# Altium PCB PCB1.PcbDoc
Units mm, origin at the board's own origin, x right, y up, seen from the top; angles counter-clockwise.
Board outline 152.4 x 101.6 mm, 2 copper layers (Top Layer, Bottom Layer); 107 components, 239 nets, 1770 pads, 0 vias.
Unrouted connection lines stored in the file: 1175.
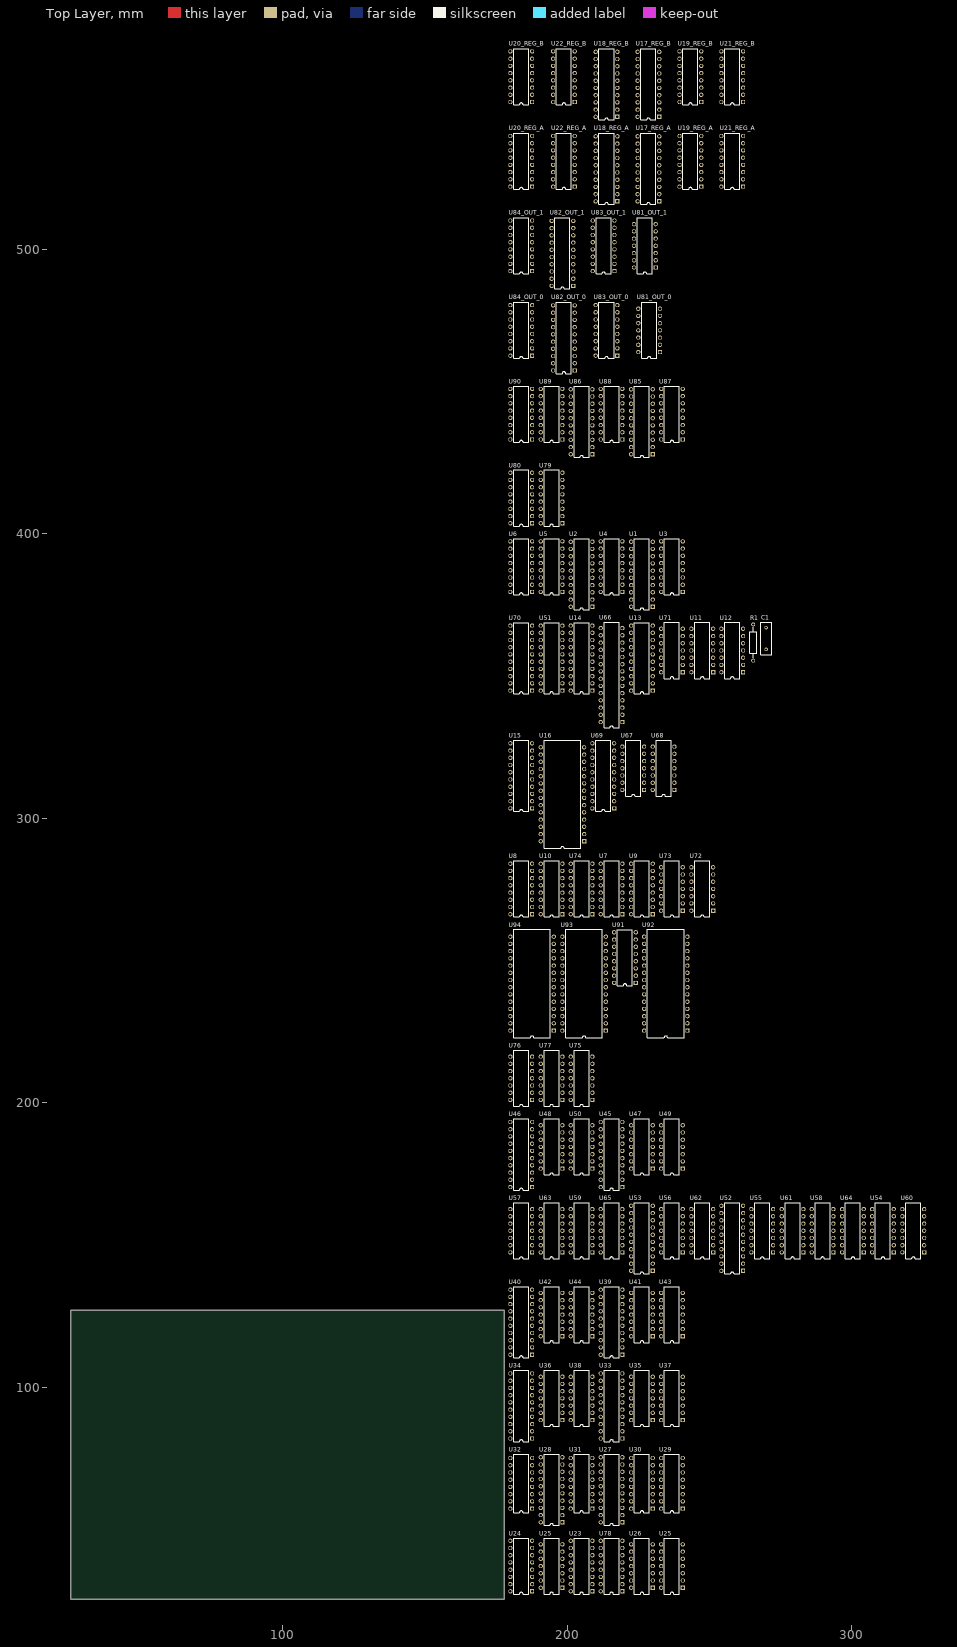
[diagram p0: Top Layer view]
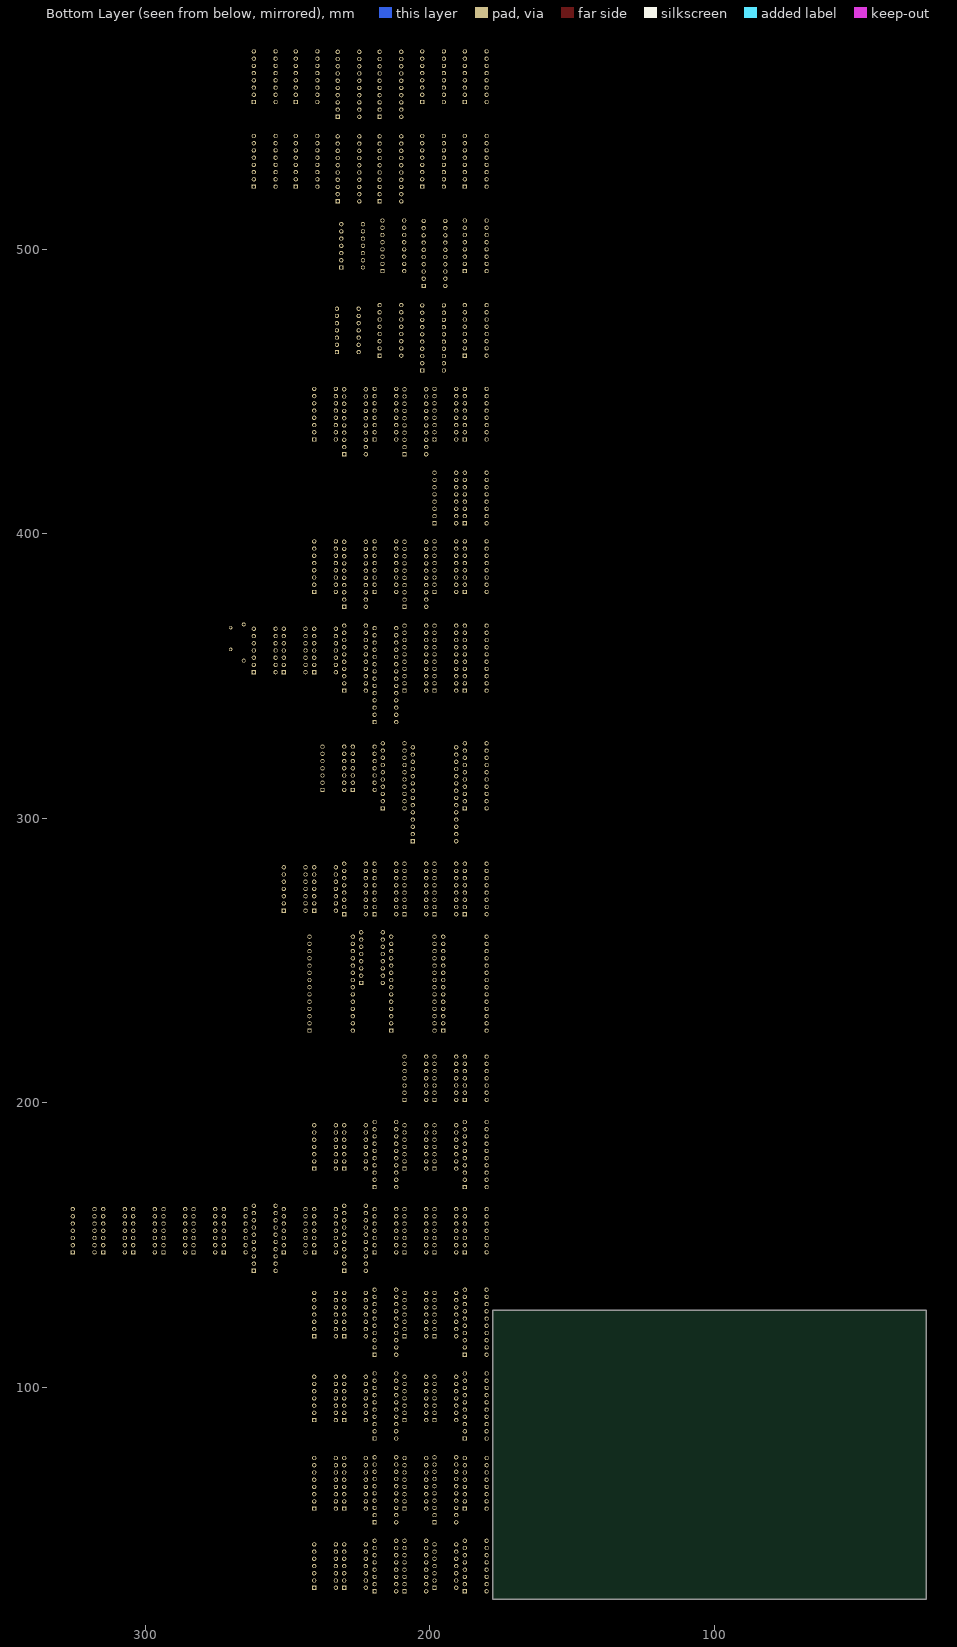
[diagram p1: Bottom Layer view, seen from below]

## Layer stack, top to bottom
Top Solder: solder mask 0.0102, Solder Resist, Dk 3.5
Top Layer: signal copper 0.0356
Dielectric 1: dielectric 0.32, FR-4, Dk 4.8
Bottom Layer: signal copper 0.0356
Bottom Solder: solder mask 0.0102, Solder Resist, Dk 3.5

## Board outline
25.4,25.4 177.8,25.4 177.8,127 25.4,127

## Design rules (kind name [scope] priority, off if disabled: settings)
Clearance [All] p1: gap=0.254 ignorepadtopadclearanceinfootprint=FALSE except(0: Arc-Hole Track-Hole SMDPad-Hole THPad-Hole Via-Hole Fill-Hole Poly-Hole Region-Hole Text-Hole)
PolygonConnect [All] p1: connectstyle=Relief reliefconductorwidth=0.254 reliefentries=4 polygonreliefangle="90 Angle" airgapwidth=0.254
RoomDefinition TIMER [InComponentClass('TIMER')] p1: confinementstyle=ConfineIn formatcopy=TRUE lockcomponents=FALSE outline 178.943,426.466 241.554,426.466 241.554,454.66 178.943,454.66
RoomDefinition REG_INST [InComponentClass('REG_INST')] p2: confinementstyle=ConfineIn formatcopy=TRUE lockcomponents=FALSE outline 178.943,402.336 199.263,402.336 199.263,425.196 178.943,425.196
RoomDefinition REG_B [InComponentClass('REG_B')] p3: confinementstyle=ConfineIn formatcopy=TRUE lockcomponents=FALSE outline 178.943,545.084 266.954,545.084 266.954,573.532 178.943,573.532
RoomDefinition REG_A [InComponentClass('REG_A')] p4: confinementstyle=ConfineIn formatcopy=TRUE lockcomponents=FALSE outline 178.943,515.366 266.954,515.366 266.954,543.814 178.943,543.814
RoomDefinition PC [InComponentClass('PC')] p5: confinementstyle=ConfineIn formatcopy=TRUE lockcomponents=FALSE outline 178.943,372.872 241.554,372.872 241.554,401.066 178.943,401.066
RoomDefinition OUT_1 [InComponentClass('OUT_1')] p6: confinementstyle=ConfineIn formatcopy=TRUE lockcomponents=FALSE outline 178.943,485.648 235.712,485.648 235.712,514.096 178.943,514.096
RoomDefinition OUT_0 [InComponentClass('OUT_0')] p7: confinementstyle=ConfineIn formatcopy=TRUE lockcomponents=FALSE outline 178.943,455.93 237.744,455.93 237.744,484.378 178.943,484.378
RoomDefinition MEM_SRAM [InComponentClass('MEM_SRAM')] p8: confinementstyle=ConfineIn formatcopy=TRUE lockcomponents=FALSE outline 178.943,331.47 272.034,331.47 272.034,371.602 178.943,371.602
RoomDefinition MEM_EEPROM [InComponentClass('MEM_EEPROM')] p9: confinementstyle=ConfineIn formatcopy=TRUE lockcomponents=FALSE outline 178.943,289.052 238.633,289.052 238.633,330.2 178.943,330.2
RoomDefinition MEM_ADDR_REG [InComponentClass('MEM_ADDR_REG')] p10: confinementstyle=ConfineIn formatcopy=TRUE lockcomponents=FALSE outline 178.943,264.922 252.222,264.922 252.222,287.782 178.943,287.782
RoomDefinition CTRL [InComponentClass('CTRL')] p11: confinementstyle=ConfineIn formatcopy=TRUE lockcomponents=FALSE outline 178.943,222.504 243.205,222.504 243.205,263.652 178.943,263.652
RoomDefinition ALU_ZF [InComponentClass('ALU_ZF')] p12: confinementstyle=ConfineIn formatcopy=TRUE lockcomponents=FALSE outline 178.943,198.374 209.804,198.374 209.804,221.234 178.943,221.234
RoomDefinition ALU_XOR [InComponentClass('ALU_XOR')] p13: confinementstyle=ConfineIn formatcopy=TRUE lockcomponents=FALSE outline 178.943,168.91 241.554,168.91 241.554,197.104 178.943,197.104
RoomDefinition ALU_SHIFTER [InComponentClass('ALU_SHIFTER')] p14: confinementstyle=ConfineIn formatcopy=TRUE lockcomponents=FALSE outline 178.943,139.446 326.39,139.446 326.39,167.64 178.943,167.64
RoomDefinition ALU_OR [InComponentClass('ALU_OR')] p15: confinementstyle=ConfineIn formatcopy=TRUE lockcomponents=FALSE outline 178.943,109.982 241.554,109.982 241.554,138.176 178.943,138.176
RoomDefinition ALU_AND [InComponentClass('ALU_AND')] p16: confinementstyle=ConfineIn formatcopy=TRUE lockcomponents=FALSE outline 178.943,80.518 241.554,80.518 241.554,108.712 178.943,108.712
RoomDefinition ALU_ADDER [InComponentClass('ALU_ADDER')] p17: confinementstyle=ConfineIn formatcopy=TRUE lockcomponents=FALSE outline 178.943,51.054 241.554,51.054 241.554,79.248 178.943,79.248
RoomDefinition ALU [InComponentClass('ALU')] p18: confinementstyle=ConfineIn formatcopy=TRUE lockcomponents=FALSE outline 178.943,26.924 241.554,26.924 241.554,49.784 178.943,49.784
RoutingVias [All] p1: holewidth=0.711 width=1.27 viastyle="Through Hole" minholewidth=0.711 minwidth=1.27 maxholewidth=0.711 maxwidth=1.27
SolderMaskExpansion [All] p1: expansion=0.102 istentingtop=FALSE
Width [All] p1: maxlimit=0.254 minlimit=0.254 preferedwidth=0.254
30 further rules are at their usual default settings.

## Classes and differential pairs
channel class Output_Register: OUT_0 OUT_1
net class REG_[7..0]: REG_0_OUT_0 REG_0_OUT_1 REG_1_OUT_0 REG_1_OUT_1 REG_2_OUT_0 REG_2_OUT_1 REG_3_OUT_0 REG_3_OUT_1 REG_4_OUT_0 REG_4_OUT_1 REG_5_OUT_0 REG_5_OUT_1 REG_6_OUT_0 REG_6_OUT_1 REG_7_OUT_0 REG_7_OUT_1
net class N000-3_[5..0]: INST_0 INST_1 INST_2 INST_3 INST_4 INST_5
net class N000-2_[15..0]: BUS_0 BUS_1 BUS_2 BUS_3 BUS_4 BUS_5 BUS_6 BUS_7 BUS_8 BUS_9 BUS_10 BUS_11 BUS_12 BUS_13 BUS_14 BUS_15
net class N000-1_[5..0]: INST_0 INST_1 INST_2 INST_3 INST_4 INST_5
component class TIMER: U85 U86 U87 U88 U89 U90
component class REG_INST: U79 U80
component class OUT_1: U81_OUT_1 U82_OUT_1 U83_OUT_1 U84_OUT_1
component class OUT_0: U81_OUT_0 U82_OUT_0 U83_OUT_0 U84_OUT_0
component class CTRL: U91 U92 U93 U94
channel class Accumulator_Register: REG_A REG_B
net class MODE_[3..0]: MODE_0 MODE_1 MODE_2 MODE_3
net class BUS_[15..0]: BUS_0 BUS_1 BUS_2 BUS_3 BUS_4 BUS_5 BUS_6 BUS_7 BUS_8 BUS_9 BUS_10 BUS_11 BUS_12 BUS_13 BUS_14 BUS_15
net class B_[15..0]: B_0 B_1 B_2 B_3 B_4 B_5 B_6 B_7 B_8 B_9 B_10 B_11 B_12 B_13 B_14 B_15
net class ADDR_[15..0]: ADDR_0 ADDR_1 ADDR_2 ADDR_3 ADDR_4 ADDR_5 ADDR_6 ADDR_7 ADDR_8 ADDR_9 ADDR_10 ADDR_11 ADDR_12 ADDR_13 ADDR_14 ADDR_15
net class A_[15..0]: A_0 A_1 A_2 A_3 A_4 A_5 A_6 A_7 A_8 A_9 A_10 A_11 A_12 A_13 A_14 A_15
component class ALU_ZF: U75 U76 U77
component class ALU_XOR: U45 U46 U47 U48 U49 U50
component class ALU_SHIFTER: U52 U53 U54 U55 U56 U57 U58 U59 U60 U61 U62 U63 U64 U65
component class REG_B: U17_REG_B U18_REG_B U19_REG_B U20_REG_B U21_REG_B U22_REG_B
component class REG_A: U17_REG_A U18_REG_A U19_REG_A U20_REG_A U21_REG_A U22_REG_A
component class PC: U1 U2 U3 U4 U5 U6
component class ALU_OR: U39 U40 U41 U42 U43 U44
component class MEM_SRAM: C1 R1 U11 U12 U13 U14 U51 U66 U70 U71
component class MEM_EEPROM: U15 U16 U67 U68 U69
component class MEM_ADDR_REG: U7 U8 U9 U10 U72 U73 U74
component class ALU_AND: U33 U34 U35 U36 U37 U38
component class ALU: U23 U24 U25 U26 U78
component class ALU_ADDER: U27 U28 U29 U30 U31 U32

## Components (designator, comment, footprint, x,y, rotation, side; value= is the part's Value field where it differs from the comment)
C1 "Cap" RAD-0.3 269.875,363.093 r90 top value=10nF
R1 "Res Semi" AXIAL-0.5 265.303,361.696 r90 top value=1K
U1 "SN74LS245N" N020 226.187,385.699 r90 top
U2 "SN74LS245N" N020 204.978,385.699 r90 top
U3 "SN74LS161AN" N016 236.728,388.366 r90 top
U4 "SN74LS161AN" N016 215.519,388.366 r90 top
U5 "SN74LS161AN" N016 194.437,388.366 r90 top
U6 "SN74LS161AN" N016 183.769,388.366 r90 top
U7 "SN74LS173AN" N016D 215.519,275.082 r90 top
U8 "SN74LS173AN" N016D 183.769,275.082 r90 top
U9 "SN74LS173AN" N016D 226.187,275.082 r90 top
U10 "SN74LS173AN" N016D 194.437,275.082 r90 top
U11 "SN74LS04N" N014 247.396,358.902 r90 top
U12 "SN74LS08N" N014 257.937,358.902 r90 top
U13 "SN74LS373N" N020 226.187,356.235 r90 top
U14 "SN74LS245N" N020 204.978,356.235 r90 top
U15 "SN74LS245N" N020 183.769,314.833 r90 top
U16 "AT28C256-15PU" J028 198.247,308.356 r90 top
U17_REG_A "SN74LS245N" N020 228.473,528.193 r90 top (schematic designator U17)
U17_REG_B "SN74LS245N" N020 228.473,557.911 r90 top (schematic designator U17)
U18_REG_A "SN74LS245N" N020 213.741,528.193 r90 top (schematic designator U18)
U18_REG_B "SN74LS245N" N020 213.741,557.911 r90 top (schematic designator U18)
U19_REG_A "SN74LS173AN" N016D 243.205,530.86 r90 top (schematic designator U19)
U19_REG_B "SN74LS173AN" N016D 243.205,560.578 r90 top (schematic designator U19)
U20_REG_A "SN74LS173AN" N016D 183.769,530.86 r90 top (schematic designator U20)
U20_REG_B "SN74LS173AN" N016D 183.769,560.578 r90 top (schematic designator U20)
U21_REG_A "SN74LS173AN" N016D 257.937,530.86 r90 top (schematic designator U21)
U21_REG_B "SN74LS173AN" N016D 257.937,560.578 r90 top (schematic designator U21)
U22_REG_A "SN74LS173AN" N016D 198.755,530.86 r90 top (schematic designator U22)
U22_REG_B "SN74LS173AN" N016D 198.755,560.578 r90 top (schematic designator U22)
U23 "SN74LS138N" N016 204.978,37.084 r90 top
U24 "SN74LS138N" N016 183.769,37.084 r90 top
U25 "SN74LS04N" N014 194.437,37.084 r90 top
U25 "SN74LS04N" N014 236.728,37.084 r90 top
U26 "SN74LS32N" N014 226.187,37.084 r90 top
U27 "SN74LS245N" N020 215.519,63.881 r90 top
U28 "SN74LS245N" N020 194.437,63.881 r90 top
U29 "SN74LS283D" J016D 236.728,66.167 r90 top
U30 "SN74LS283D" J016D 226.187,66.167 r90 top
U31 "SN74LS283D" J016D 204.978,66.167 r90 top
U32 "SN74LS283D" J016D 183.769,66.167 r90 top
U33 "SN74LS245N" N020 215.519,93.345 r90 top
U34 "SN74LS245N" N020 183.769,93.345 r90 top
U35 "SN74LS08N" N014 226.187,96.012 r90 top
U36 "SN74LS08N" N014 194.437,96.012 r90 top
U37 "SN74LS08N" N014 236.728,96.012 r90 top
U38 "SN74LS08N" N014 204.978,96.012 r90 top
U39 "SN74LS245N" N020 215.519,122.809 r90 top
U40 "SN74LS245N" N020 183.769,122.809 r90 top
U41 "SN74LS32N" N014 226.187,125.476 r90 top
U42 "SN74LS32N" N014 194.437,125.476 r90 top
U43 "SN74LS32N" N014 236.728,125.476 r90 top
U44 "SN74LS32N" N014 204.978,125.476 r90 top
U45 "SN74LS245N" N020 215.519,181.737 r90 top
U46 "SN74LS245N" N020 183.769,181.737 r90 top
U47 "SN74LS86AN" N014 226.187,184.404 r90 top
U48 "SN74LS86AN" N014 194.437,184.404 r90 top
U49 "SN74LS86AN" N014 236.728,184.404 r90 top
U50 "SN74LS86AN" N014 204.978,184.404 r90 top
U51 "SN74LS245N" N020 194.437,356.235 r90 top
U52 "SN74LS245N" N020 257.937,152.273 r90 top
U53 "SN74LS245N" N020 226.187,152.273 r90 top
U54 "SN74LS08N" N014 310.896,154.94 r90 top
U55 "SN74LS08N" N014 268.478,154.94 r90 top
U56 "SN74LS08N" N014 236.728,154.94 r90 top
U57 "SN74LS08N" N014 183.769,154.94 r90 top
U58 "SN74LS32N" N014 289.687,154.94 r90 top
U59 "SN74LS32N" N014 204.978,154.94 r90 top
U60 "SN74LS08N" N014 321.564,154.94 r90 top
U61 "SN74LS08N" N014 279.146,154.94 r90 top
U62 "SN74LS08N" N014 247.396,154.94 r90 top
U63 "SN74LS08N" N014 194.437,154.94 r90 top
U64 "SN74LS32N" N014 300.355,154.94 r90 top
U65 "SN74LS32N" N014 215.519,154.94 r90 top
U66 "71256SA20TPG" JT028 215.519,350.266 r90 top
U67 "SN74LS04N" N014 223.139,317.5 r90 top
U68 "SN74LS08N" N014 233.807,317.5 r90 top
U69 "SN74LS373N" N020 212.598,314.833 r90 top
U70 "SN74LS245N" N020 183.769,356.235 r90 top
U71 "SN74LS00N" N014 236.728,358.902 r90 top
U72 "SN74LS04N" N014 247.396,275.082 r90 top
U73 "SN74LS08N" N014 236.728,275.082 r90 top
U74 "SN74LS138N" N016 204.978,275.082 r90 top
U75 "SN74LS02N" N014 204.978,208.534 r90 top
U76 "SN74LS02N" N014 183.769,208.534 r90 top
U77 "SN74LS30N" N014 194.437,208.534 r90 top
U78 "SN74LS173AN" N016D 215.519,37.084 r90 top
U79 "SN74LS173AN" N016D 194.437,412.496 r90 top
U80 "SN74LS173AN" N016D 183.769,412.496 r90 top
U81_OUT_0 "SN74LS00N" N014 228.727,471.424 r90 top (schematic designator U81)
U81_OUT_1 "SN74LS00N" N014 227.203,501.142 r90 top (schematic designator U81)
U82_OUT_0 "SN74LS245N" N020 198.755,468.757 r90 top (schematic designator U82)
U82_OUT_1 "SN74LS245N" N020 198.247,498.475 r90 top (schematic designator U82)
U83_OUT_0 "SN74LS173AN" N016D 213.741,471.424 r90 top (schematic designator U83)
U83_OUT_1 "SN74LS173AN" N016D 212.725,501.142 r90 top (schematic designator U83)
U84_OUT_0 "SN74LS173AN" N016D 183.769,471.424 r90 top (schematic designator U84)
U84_OUT_1 "SN74LS173AN" N016D 183.769,501.142 r90 top (schematic designator U84)
U85 "SN74LS245N" N020 226.187,439.293 r90 top
U86 "SN74LS245N" N020 204.978,439.293 r90 top
U87 "SN74LS161AN" N016 236.728,441.96 r90 top
U88 "SN74LS161AN" N016 215.519,441.96 r90 top
U89 "SN74LS161AN" N016 194.437,441.96 r90 top
U90 "SN74LS161AN" N016 183.769,441.96 r90 top
U91 "SN74LS161AN" N016 220.218,250.952 r90 top
U92 "AT28C256-15PU" J028 234.569,241.808 r90 top
U93 "AT28C256-15PU" J028 205.867,241.808 r90 top
U94 "AT28C256-15PU" J028 187.579,241.808 r90 top

## Footprints (in the part's own frame and the unit in brackets; to place one, negate y for a bottom-side part, rotate by r counter-clockwise, add the part's x,y. Pads: shape width x height; smd on the part's side, far side on the other; paste and mask are expansions set on the pad)
AXIAL-0.5 [mm] "Axial Device, Thru-Hole; 2 Leads; 0.5 in Pin Spacing"
  round 1.4 hole 0.85: 1(-6.35,0) 2(6.35,0)
  silkscreen extent -5.33,-1.27 5.33,1.27
J016D [mm] "DIP; 16 Leads; Row Spacing 7.62 mm; Pitch 2.54 mm"
  rect 1.5x1.5 hole 0.9: 1(-8.89,-3.81)
  round 1.5 hole 0.9: 2(-6.35,-3.81) 3(-3.81,-3.81) 4(-1.27,-3.81) 5(1.27,-3.81) 6(3.81,-3.81) 7(6.35,-3.81) 8(8.89,-3.81) 9(8.89,3.81) 10(6.35,3.81) 11(3.81,3.81) 12(1.27,3.81) 13(-1.27,3.81) 14(-3.81,3.81) 15(-6.35,3.81) 16(-8.89,3.81)
  silkscreen extent -10.3,-2.65 10.3,2.65
J028 [mm] "DIP; 28 Leads; Row Spacing 15.24 mm; Pitch 2.54 mm"
  rect 1.5x1.5 hole 0.9: 1(-16.51,-7.62)
  round 1.5 hole 0.9: 2(-13.97,-7.62) 3(-11.43,-7.62) 4(-8.89,-7.62) 5(-6.35,-7.62) 6(-3.81,-7.62) 7(-1.27,-7.62) 8(1.27,-7.62) 9(3.81,-7.62) 10(6.35,-7.62) 11(8.89,-7.62) 12(11.43,-7.62) 13(13.97,-7.62) 14(16.51,-7.62) 15(16.51,7.62) 16(13.97,7.62) 17(11.43,7.62) 18(8.89,7.62) 19(6.35,7.62) 20(3.81,7.62) 21(1.27,7.62) 22(-1.27,7.62) 23(-3.81,7.62) 24(-6.35,7.62) 25(-8.89,7.62) 26(-11.43,7.62) 27(-13.97,7.62) 28(-16.51,7.62)
  silkscreen extent -19.05,-6.45 19.05,6.45
JT028 [mm] "DIP; 28 Leads; Row Spacing 7.62 mm; Pitch 2.54 mm"
  rect 1.5x1.5 hole 0.9: 1(-16.51,-3.81)
  round 1.5 hole 0.9: 2(-13.97,-3.81) 3(-11.43,-3.81) 4(-8.89,-3.81) 5(-6.35,-3.81) 6(-3.81,-3.81) 7(-1.27,-3.81) 8(1.27,-3.81) 9(3.81,-3.81) 10(6.35,-3.81) 11(8.89,-3.81) 12(11.43,-3.81) 13(13.97,-3.81) 14(16.51,-3.81) 15(16.51,3.81) 16(13.97,3.81) 17(11.43,3.81) 18(8.89,3.81) 19(6.35,3.81) 20(3.81,3.81) 21(1.27,3.81) 22(-1.27,3.81) 23(-3.81,3.81) 24(-6.35,3.81) 25(-8.89,3.81) 26(-11.43,3.81) 27(-13.97,3.81) 28(-16.51,3.81)
  silkscreen extent -18.55,-2.65 18.55,2.65
N014 [mm] "DIP; 14 Leads; Row Spacing 7.62 mm; Pitch 2.54 mm"
  rect 1.5x1.5 hole 0.9: 1(-7.62,-3.81)
  round 1.5 hole 0.9: 2(-5.08,-3.81) 3(-2.54,-3.81) 4(0,-3.81) 5(2.54,-3.81) 6(5.08,-3.81) 7(7.62,-3.81) 8(7.62,3.81) 9(5.08,3.81) 10(2.54,3.81) 11(0,3.81) 12(-2.54,3.81) 13(-5.08,3.81) 14(-7.62,3.81)
  silkscreen extent -9.85,-2.65 9.85,2.65
N016 [mm] "DIP; 16 Leads; Row Spacing 7.62 mm; Pitch 2.54 mm"
  rect 1.5x1.5 hole 0.9: 1(-8.89,-3.81)
  round 1.5 hole 0.9: 2(-6.35,-3.81) 3(-3.81,-3.81) 4(-1.27,-3.81) 5(1.27,-3.81) 6(3.81,-3.81) 7(6.35,-3.81) 8(8.89,-3.81) 9(8.89,3.81) 10(6.35,3.81) 11(3.81,3.81) 12(1.27,3.81) 13(-1.27,3.81) 14(-3.81,3.81) 15(-6.35,3.81) 16(-8.89,3.81)
  silkscreen extent -9.85,-2.65 9.85,2.65
N016D [mm] "DIP; 16 Leads; Row Spacing 7.62 mm; Pitch 2.54 mm"
  rect 1.5x1.5 hole 0.9: 1(-8.89,-3.81)
  round 1.5 hole 0.9: 2(-6.35,-3.81) 3(-3.81,-3.81) 4(-1.27,-3.81) 5(1.27,-3.81) 6(3.81,-3.81) 7(6.35,-3.81) 8(8.89,-3.81) 9(8.89,3.81) 10(6.35,3.81) 11(3.81,3.81) 12(1.27,3.81) 13(-1.27,3.81) 14(-3.81,3.81) 15(-6.35,3.81) 16(-8.89,3.81)
  silkscreen extent -9.85,-2.65 9.85,2.65
N020 [mm] "DIP; 20 Leads; Row Spacing 7.62 mm; Pitch 2.54 mm"
  rect 1.5x1.5 hole 0.9: 1(-11.43,-3.81)
  round 1.5 hole 0.9: 2(-8.89,-3.81) 3(-6.35,-3.81) 4(-3.81,-3.81) 5(-1.27,-3.81) 6(1.27,-3.81) 7(3.81,-3.81) 8(6.35,-3.81) 9(8.89,-3.81) 10(11.43,-3.81) 11(11.43,3.81) 12(8.89,3.81) 13(6.35,3.81) 14(3.81,3.81) 15(1.27,3.81) 16(-1.27,3.81) 17(-3.81,3.81) 18(-6.35,3.81) 19(-8.89,3.81) 20(-11.43,3.81)
  silkscreen extent -12.5,-2.65 12.5,2.65
RAD-0.3 [mm] "Radial Cap, Thru-Hole; 2 Leads; 0.3 in Pin Spacing"
  round 1.2 hole 0.7: 1(-3.81,0) 2(3.81,0)
  silkscreen extent -5.71,-1.91 5.71,1.91

## Part data
C1: "Capacitor", LatestRevisionDate=17-Jul-2002, LatestRevisionNote="Re-released for DXP Platform.", PackageDescription="Radial Cap, Thru-Hole; 2 Leads; 0.3 in Pin Spacing", PackageReference=RAD-0.3, Published=8-Jun-2000, Publisher="Altium Limited"
R1: "Semiconductor Resistor", LatestRevisionDate=17-Jul-2002, LatestRevisionNote="Re-released for DXP Platform.", PackageDescription="Axial Device, Thru-Hole; 2 Leads; 0.5 in Pin Spacing", PackageReference=AXIAL-0.5, Published=8-Jun-2000, Publisher="Altium Limited"
U1 U2 U14 U15 U17_REG_A U17_REG_B U18_REG_A U18_REG_B U27 U28 U33 U34 U39 U40 U45 U46 U51 U52 U53 U70 U82_OUT_0 U82_OUT_1 U85 U86: "Octal Bus Transceiver with 3-State Outputs", ComponentLink1Description="Manufacturer Link", ComponentLink1URL=http://www.ti.com/, ComponentLink2Description=Datasheet, ComponentLink2URL=http://www-s.ti.com/sc/ds/sn74ls245.pdf, DatasheetVersion=Mar-1988, LatestRevisionDate=04-Mar-2005, LatestRevisionNote="Stylized 3D Model Added.", PackageDescription="DIP; 20 Leads; Row Spacing 7.62 mm; Pitch 2.54 mm", PackageReference=N020, PackageVersion=Oct-1995, Published=8-Jun-2000, Publisher="Altium Limited"
U3 U4 U5 U6 U87 U88 U89 U90 U91: "Synchronous 4-Bit Counter", Code_JEDEC=MS-001-BB, ComponentLink1Description="Manufacturer Link", ComponentLink1URL=http://www.ti.com/, ComponentLink2Description=Datasheet, ComponentLink2URL=http://www-s.ti.com/sc/ds/sn74ls161a.pdf, ComponentLink3Description="URL Link1", ComponentLink3URL=http://focus.ti.com/docs/prod/folders/print/sn74ls161a.html, DatasheetVersion=Mar-1988, LatestRevisionDate=04-Mar-2005, LatestRevisionNote="Stylized 3D Model Added.", PackageDescription="DIP; 16 Leads; Row Spacing 7.62 mm; Pitch 2.54 mm", PackageReference=N016, PackageVersion=Oct-1995, Published=8-Jun-2000, Publisher="Altium Limited"
U7 U8 U9 U10 U19_REG_A U19_REG_B U20_REG_A U20_REG_B U21_REG_A U21_REG_B U22_REG_A U22_REG_B U78 U79 U80 U83_OUT_0 U83_OUT_1 U84_OUT_0 U84_OUT_1: "4-Bit D-Type Register with 3-State Outputs", Code_JEDEC=MS-001-BB, ComponentLink1Description="Manufacturer Link", ComponentLink1URL=http://www.ti.com/, ComponentLink2Description=Datasheet, ComponentLink2URL=http://www-s.ti.com/sc/ds/sn74ls173a.pdf, DatasheetVersion=Mar-1988, LatestRevisionDate=04-Mar-2005, LatestRevisionNote="Stylized 3D Model Added.", PackageDescription="DIP; 16 Leads; Row Spacing 7.62 mm; Pitch 2.54 mm", PackageReference=N016D, PackageVersion=Oct-1995, Published=8-Jun-2000, Publisher="Altium Limited"
U11 U25 U25 U67 U72: "Hex Inverter", ComponentLink1Description="Manufacturer Link", ComponentLink1URL=http://www.ti.com/, ComponentLink2Description=Datasheet, ComponentLink2URL=http://www-s.ti.com/sc/ds/sn74ls04.pdf, DatasheetVersion=Mar-1988, LatestRevisionDate=04-Mar-2005, LatestRevisionNote="Stylized 3D Model Added.", PackageDescription="DIP; 14 Leads; Row Spacing 7.62 mm; Pitch 2.54 mm", PackageReference=N014, PackageVersion=Oct-1995, Published=8-Jun-2000, Publisher="Altium Limited"
U12 U35 U36 U37 U38 U54 U55 U56 U57 U60 U61 U62 U63 U68 U73: "Quadruple 2-Input Positive-AND Gate", ComponentLink1Description="Manufacturer Link", ComponentLink1URL=http://www.ti.com/, ComponentLink2Description=Datasheet, ComponentLink2URL=http://www-s.ti.com/sc/ds/SN74LS08.pdf, DatasheetVersion=Mar-1988, LatestRevisionDate=04-Mar-2005, LatestRevisionNote="Stylized 3D Model Added.", PackageDescription="DIP; 14 Leads; Row Spacing 7.62 mm; Pitch 2.54 mm", PackageReference=N014, PackageVersion=Oct-1995, Published=8-Jun-2000, Publisher="Altium Limited"
U13 U69: "Octal D-Type Transparent Latche and Edge-Triggered Flip-Flops", ComponentLink1Description="Manufacturer Link", ComponentLink1URL=http://www.ti.com/, ComponentLink2Description=Datasheet, ComponentLink2URL=http://www-s.ti.com/sc/ds/sn74s373.pdf, DatasheetVersion=Mar-1988, LatestRevisionDate=04-Mar-2005, LatestRevisionNote="Stylized 3D Model Added.", PackageDescription="DIP; 20 Leads; Row Spacing 7.62 mm; Pitch 2.54 mm", PackageReference=N020, PackageVersion=Oct-1995, Published=8-Jun-2000, Publisher="Altium Limited"
U23 U24 U74: "3-Line to 8-Line Decoder / Demultiplexer", Code_JEDEC=MS-001-BB, ComponentLink1Description="Manufacturer Link", ComponentLink1URL=http://www.ti.com/, ComponentLink2Description=Datasheet, ComponentLink2URL=http://www-s.ti.com/sc/ds/sn74ls138.pdf, DatasheetVersion=Mar-1988, LatestRevisionDate=04-Mar-2005, LatestRevisionNote="Stylized 3D Model Added.", PackageDescription="DIP; 16 Leads; Row Spacing 7.62 mm; Pitch 2.54 mm", PackageReference=N016, PackageVersion=Oct-1995, Published=8-Jun-2000, Publisher="Altium Limited"
U26 U41 U42 U43 U44 U58 U59 U64 U65: "Quadruple 2-Input Positive-OR Gate", ComponentLink1Description="Manufacturer Link", ComponentLink1URL=http://www.ti.com/, ComponentLink2Description=Datasheet, ComponentLink2URL=http://www-s.ti.com/sc/ds/sn74ls32.pdf, DatasheetVersion=Mar-1988, LatestRevisionDate=04-Mar-2005, LatestRevisionNote="Stylized 3D Model Added.", PackageDescription="DIP; 14 Leads; Row Spacing 7.62 mm; Pitch 2.54 mm", PackageReference=N014, PackageVersion=Oct-1995, Published=8-Jun-2000, Publisher="Altium Limited"
U29 U30 U31 U32: "4-Bit Binary Full Adder with Fast Carry", ComponentLink1Description="Manufacturer Link", ComponentLink1URL=http://www.ti.com, ComponentLink2Description=Datasheet, ComponentLink2URL=http://www-s.ti.com/sc/ds/sn54ls283.pdf, DatasheetVersion=Mar-1988, LatestRevisionDate=04-Mar-2005, LatestRevisionNote="Stylized 3D Model Added.", PackageDescription="DIP; 16 Leads; Row Spacing 7.62 mm; Pitch 2.54 mm", PackageReference=J016D, PackageVersion=Jun-1999, Published=8-Jun-2000, Publisher="Altium Limited"
U47 U48 U49 U50: "Quadruple 2-Input Exclusive-OR Gate", ComponentLink1Description="Manufacturer Link", ComponentLink1URL=http://www.ti.com/, ComponentLink2Description=Datasheet, ComponentLink2URL=http://www-s.ti.com/sc/ds/sn74ls86a.pdf, DatasheetVersion=Mar-1988, LatestRevisionDate=04-Mar-2005, LatestRevisionNote="Stylized 3D Model Added.", PackageDescription="DIP; 14 Leads; Row Spacing 7.62 mm; Pitch 2.54 mm", PackageReference=N014, PackageVersion=Oct-1995, Published=8-Jun-2000, Publisher="Altium Limited"
U71 U81_OUT_0 U81_OUT_1: "Quadruple 2-Input Positive-NAND Gate", ComponentLink1Description="Manufacturer Link", ComponentLink1URL=http://www.ti.com/, ComponentLink2Description=Datasheet, ComponentLink2URL=http://www-s.ti.com/sc/ds/sn74ls00.pdf, DatasheetVersion=Mar-1988, LatestRevisionDate=04-Mar-2005, LatestRevisionNote="Stylized 3D Model Added.", PackageDescription="DIP; 14 Leads; Row Spacing 7.62 mm; Pitch 2.54 mm", PackageReference=N014, PackageVersion=Oct-1995, Published=8-Jun-2000, Publisher="Altium Limited"
U75 U76: "Quadruple 2-Input Positive-NOR Gate", ComponentLink1Description="Manufacturer Link", ComponentLink1URL=http://www.ti.com/, ComponentLink2Description=Datasheet, ComponentLink2URL=http://www-s.ti.com/sc/ds/sn54s02.pdf, DatasheetVersion=Mar-1988, LatestRevisionDate=04-Mar-2005, LatestRevisionNote="Stylized 3D Model Added.", PackageDescription="DIP; 14 Leads; Row Spacing 7.62 mm; Pitch 2.54 mm", PackageReference=N014, PackageVersion=Oct-1995, Published=8-Jun-2000, Publisher="Altium Limited"
U77: "8-Input Positive-NAND Gate", ComponentLink1Description="Manufacturer Link", ComponentLink1URL=http://www.ti.com/, ComponentLink2Description=Datasheet, ComponentLink2URL=http://www-s.ti.com/sc/ds/sn74s30.pdf, DatasheetVersion=Mar-1988, LatestRevisionDate=04-Mar-2005, LatestRevisionNote="Stylized 3D Model Added.", Note="Pins 9, 10  and 13 are NC & not drawn.", PackageDescription="DIP; 14 Leads; Row Spacing 7.62 mm; Pitch 2.54 mm", PackageReference=N014, PackageVersion=Oct-1995, Published=8-Jun-2000, Publisher="Altium Limited"

## Nets (pads, with @x,y where several pads share a name; then routed paths per layer and width w, separated by ;. In a path a pad name is that pad's centre, name@x,y a point inside that pad or via, vN(x,y) a via of type N, cw(c..) or ccw(c..) an arc to the next point about the centre after c; other vN are vias at no path point)
A0_RS: U54.3 U65.9
A7_LS: U57.11 U59.12
A8_RS: U59.10 U60.3
A15_LS: U63.11 U65.10
A\D\D\: U23.14 U25.1@240.538,29.464
A\I\: U19_REG_A.9 U19_REG_A.10 U20_REG_A.9 U20_REG_A.10 U21_REG_A.9 U21_REG_A.10 U22_REG_A.9 U22_REG_A.10 U92.16
A\N\D\: U23.12 U33.19 U34.19
A\O\: U17_REG_A.19 U18_REG_A.19 U92.17
A_0: U17_REG_A.2 U17_REG_B.2 U19_REG_A.3 U19_REG_B.3 U29.5 U29.6 U35.1 U35.2 U41.1 U41.2 U54.2 U54.4
A_1: U17_REG_A.3 U17_REG_B.3 U19_REG_A.4 U19_REG_B.4 U29.2 U29.3 U35.4 U35.5 U41.4 U41.5 U54.10 U54.12
A_2: U17_REG_A.4 U17_REG_B.4 U19_REG_A.5 U19_REG_B.5 U29.14 U29.15 U35.9 U35.10 U41.9 U41.10 U55.2 U55.4
A_3: U17_REG_A.5 U17_REG_B.5 U19_REG_A.6 U19_REG_B.6 U29.11 U29.12 U35.12 U35.13 U41.12 U41.13 U55.10 U55.12
A_4: U17_REG_A.6 U17_REG_B.6 U20_REG_A.3 U20_REG_B.3 U30.5 U30.6 U36.1 U36.2 U42.1 U42.2 U56.2 U56.4
A_5: U17_REG_A.7 U17_REG_B.7 U20_REG_A.4 U20_REG_B.4 U30.2 U30.3 U36.4 U36.5 U42.4 U42.5 U56.10 U56.12
A_6: U17_REG_A.8 U17_REG_B.8 U20_REG_A.5 U20_REG_B.5 U30.14 U30.15 U36.9 U36.10 U42.9 U42.10 U57.2 U57.4
A_7: U17_REG_A.9 U17_REG_B.9 U20_REG_A.6 U20_REG_B.6 U30.11 U30.12 U36.12 U36.13 U42.12 U42.13 U57.10 U57.12
A_8: U18_REG_A.2 U18_REG_B.2 U21_REG_A.3 U21_REG_B.3 U31.5 U31.6 U37.1 U37.2 U43.1 U43.2 U60.2 U60.4
A_9: U18_REG_A.3 U18_REG_B.3 U21_REG_A.4 U21_REG_B.4 U31.2 U31.3 U37.4 U37.5 U43.4 U43.5 U60.10 U60.12
A_10: U18_REG_A.4 U18_REG_B.4 U21_REG_A.5 U21_REG_B.5 U31.14 U31.15 U37.9 U37.10 U43.9 U43.10 U61.2 U61.4
A_11: U18_REG_A.5 U18_REG_B.5 U21_REG_A.6 U21_REG_B.6 U31.11 U31.12 U37.12 U37.13 U43.12 U43.13 U61.10 U61.12
A_12: U18_REG_A.6 U18_REG_B.6 U22_REG_A.3 U22_REG_B.3 U32.5 U32.6 U38.1 U38.2 U44.1 U44.2 U62.2 U62.4
A_13: U18_REG_A.7 U18_REG_B.7 U22_REG_A.4 U22_REG_B.4 U32.2 U32.3 U38.4 U38.5 U44.4 U44.5 U62.10 U62.12
A_14: U18_REG_A.8 U18_REG_B.8 U22_REG_A.5 U22_REG_B.5 U32.14 U32.15 U38.9 U38.10 U44.9 U44.10 U63.2 U63.4
A_15: U18_REG_A.9 U18_REG_B.9 U22_REG_A.6 U22_REG_B.6 U32.11 U32.12 U38.12 U38.13 U44.12 U44.13 U63.10 U63.12
ADDR_0: U7.3 U16.10 U66.10 U74.1
ADDR_1: U7.4 U16.9 U66.9 U74.2
ADDR_2: U7.5 U16.8 U66.8 U74.3
ADDR_3: U7.6 U16.7 U66.7
ADDR_4: U8.3 U16.6 U66.6
ADDR_5: U8.4 U16.5 U66.5
ADDR_6: U8.5 U16.4 U66.4
ADDR_7: U8.6 U16.3 U66.3
ADDR_8: U9.3 U16.25 U66.25
ADDR_9: U9.4 U16.24 U66.24
ADDR_10: U9.5 U16.21 U66.21
ADDR_11: U9.6 U16.23 U66.23
ADDR_12: U10.3 U16.2 U66.2
ADDR_13: U10.4 U16.26 U66.26
ADDR_14: U10.5 U16.1 U72.3 U73.5
ADDR_15: U10.6 U72.1 U73.1 U73.4
B\I\: U19_REG_B.9 U19_REG_B.10 U20_REG_B.9 U20_REG_B.10 U21_REG_B.9 U21_REG_B.10 U22_REG_B.9 U22_REG_B.10 U92.18
B_0: U47.2
B_1: U47.5
B_2: U47.10
B_3: U47.13
B_4: U48.2
B_5: U48.5
B_6: U48.10
B_7: U48.13
B_8: U49.2
B_9: U49.5
B_10: U49.10
B_11: U49.13
B_12: U50.2
B_13: U50.5
B_14: U50.10
B_15: U50.13
BUS_0: U1.18 U3.3 U7.14 U13.2 U17_REG_A.18 U17_REG_B.18 U19_REG_A.14 U19_REG_B.14 U27.18 U33.18 U39.18 U45.18 U51.18 U52.18 U69.2 U75.2 U82_OUT_0.18 U82_OUT_1.18 U83_OUT_0.14 U83_OUT_1.14 U85.18
BUS_1: U1.17 U3.4 U7.13 U13.5 U17_REG_A.17 U17_REG_B.17 U19_REG_A.13 U19_REG_B.13 U27.17 U33.17 U39.17 U45.17 U51.17 U52.17 U69.5 U75.3 U82_OUT_0.17 U82_OUT_1.17 U83_OUT_0.13 U83_OUT_1.13 U85.17
BUS_2: U1.16 U3.5 U7.12 U13.6 U17_REG_A.16 U17_REG_B.16 U19_REG_A.12 U19_REG_B.12 U27.16 U33.16 U39.16 U45.16 U51.16 U52.16 U69.6 U75.5 U82_OUT_0.16 U82_OUT_1.16 U83_OUT_0.12 U83_OUT_1.12 U85.16
BUS_3: U1.15 U3.6 U7.11 U13.9 U17_REG_A.15 U17_REG_B.15 U19_REG_A.11 U19_REG_B.11 U27.15 U33.15 U39.15 U45.15 U51.15 U52.15 U69.9 U75.6 U82_OUT_0.15 U82_OUT_1.15 U83_OUT_0.11 U83_OUT_1.11 U85.15
BUS_4: U1.14 U4.3 U8.14 U13.12 U17_REG_A.14 U17_REG_B.14 U20_REG_A.14 U20_REG_B.14 U27.14 U33.14 U39.14 U45.14 U51.14 U52.14 U69.12 U75.8 U82_OUT_0.14 U82_OUT_1.14 U84_OUT_0.14 U84_OUT_1.14 U85.14
BUS_5: U1.13 U4.4 U8.13 U13.15 U17_REG_A.13 U17_REG_B.13 U20_REG_A.13 U20_REG_B.13 U27.13 U33.13 U39.13 U45.13 U51.13 U52.13 U69.15 U75.9 U82_OUT_0.13 U82_OUT_1.13 U84_OUT_0.13 U84_OUT_1.13 U85.13
BUS_6: U1.12 U4.5 U8.12 U13.16 U17_REG_A.12 U17_REG_B.12 U20_REG_A.12 U20_REG_B.12 U27.12 U33.12 U39.12 U45.12 U51.12 U52.12 U69.16 U75.11 U82_OUT_0.12 U82_OUT_1.12 U84_OUT_0.12 U84_OUT_1.12 U85.12
BUS_7: U1.11 U4.6 U8.11 U13.19 U17_REG_A.11 U17_REG_B.11 U20_REG_A.11 U20_REG_B.11 U27.11 U33.11 U39.11 U45.11 U51.11 U52.11 U69.19 U75.12 U82_OUT_0.11 U82_OUT_1.11 U84_OUT_0.11 U84_OUT_1.11 U85.11
BUS_8: U2.18 U5.3 U9.14 U14.18 U15.18 U18_REG_A.18 U18_REG_B.18 U21_REG_A.14 U21_REG_B.14 U28.18 U34.18 U40.18 U46.18 U53.18 U70.18 U76.2 U86.18
BUS_9: U2.17 U5.4 U9.13 U14.17 U15.17 U18_REG_A.17 U18_REG_B.17 U21_REG_A.13 U21_REG_B.13 U28.17 U34.17 U40.17 U46.17 U53.17 U70.17 U76.3 U86.17
BUS_10: U2.16 U5.5 U9.12 U14.16 U15.16 U18_REG_A.16 U18_REG_B.16 U21_REG_A.12 U21_REG_B.12 U28.16 U34.16 U40.16 U46.16 U53.16 U70.16 U76.5 U86.16
BUS_11: U2.15 U5.6 U9.11 U14.15 U15.15 U18_REG_A.15 U18_REG_B.15 U21_REG_A.11 U21_REG_B.11 U28.15 U34.15 U40.15 U46.15 U53.15 U70.15 U76.6 U86.15
BUS_12: U2.14 U6.3 U10.14 U14.14 U15.14 U18_REG_A.14 U18_REG_B.14 U22_REG_A.14 U22_REG_B.14 U28.14 U34.14 U40.14 U46.14 U53.14 U70.14 U76.8 U86.14
BUS_13: U2.13 U6.4 U10.13 U14.13 U15.13 U18_REG_A.13 U18_REG_B.13 U22_REG_A.13 U22_REG_B.13 U28.13 U34.13 U40.13 U46.13 U53.13 U70.13 U76.9 U86.13
BUS_14: U2.12 U6.5 U10.12 U14.12 U15.12 U18_REG_A.12 U18_REG_B.12 U22_REG_A.12 U22_REG_B.12 U28.12 U34.12 U40.12 U46.12 U53.12 U70.12 U76.11 U86.12
BUS_15: U2.11 U6.6 U10.11 U14.11 U15.11 U18_REG_A.11 U18_REG_B.11 U22_REG_A.11 U22_REG_B.11 U28.11 U34.11 U40.11 U46.11 U53.11 U70.11 U76.12 U86.11
C\E\: U3.7 U3.10 U4.7 U5.7 U6.7 U92.13
C\L\K\: U67.6 U68.13
CLK: U3.2 U4.2 U5.2 U6.2 U7.7 U8.7 U9.7 U10.7 U11.5 U11.11 U19_REG_A.7 U19_REG_B.7 U20_REG_A.7 U20_REG_B.7 U21_REG_A.7 U21_REG_B.7 U22_REG_A.7 U22_REG_B.7 U67.5 U78.7 U79.7 U80.7 U83_OUT_0.7 U83_OUT_1.7 U84_OUT_0.7 U84_OUT_1.7
CLR: U3.1 U4.1 U5.1 U6.1 U7.15 U8.15 U9.15 U10.15 U19_REG_A.15 U19_REG_B.15 U20_REG_A.15 U20_REG_B.15 U21_REG_A.15 U21_REG_B.15 U22_REG_A.15 U22_REG_B.15 U78.15 U79.15 U80.15 U83_OUT_0.15 U83_OUT_1.15 U84_OUT_0.15 U84_OUT_1.15 U87.1 U88.1 U89.1 U90.1
CO: U92.26 U93.26 U94.26
CO_IM: U26.8 U78.14
EN: U12.1 U12.5 U73.3
EN_OUT_0: U72.6 U81_OUT_0.4 U81_OUT_0.12
EN_OUT_1: U72.8 U81_OUT_1.4 U81_OUT_1.12
F\I\: U78.9 U78.10 U92.19
GND: R1.1 U1.10 U2.10 U3.8 U4.8 U5.8 U6.8 U7.1 U7.2 U7.8 U8.1 U8.2 U8.8 U9.1 U9.2 U9.8 U10.1 U10.2 U10.8 U11.7 U12.7 U13.10 U14.10 U15.10 U16.14 U16.20 U16.22 U17_REG_A.10 U17_REG_B.10 U18_REG_A.10 U18_REG_B.10 U19_REG_A.1 U19_REG_A.2 U19_REG_A.8 U19_REG_B.1 U19_REG_B.2 U19_REG_B.8 U20_REG_A.1 U20_REG_A.2 U20_REG_A.8 U20_REG_B.1 U20_REG_B.2 U20_REG_B.8 U21_REG_A.1 U21_REG_A.2 U21_REG_A.8 U21_REG_B.1 U21_REG_B.2 U21_REG_B.8 U22_REG_A.1 U22_REG_A.2 U22_REG_A.8 U22_REG_B.1 U22_REG_B.2 U22_REG_B.8 U23.5 U23.8 U24.4 U24.5 U24.8 U25.7 U26.7 U27.10 U28.10 U29.8 U30.8 U31.8 U32.8 U33.10 U34.10 U35.7 U36.7 U37.7 U38.7 U39.10 U40.10 U41.7 U42.7 U43.7 U44.7 U45.10 U46.10 U47.7 U48.7 U49.7 U50.7 U51.1 U52.10 U53.10 U54.7 U55.7 U56.7 U57.7 U58.7 U59.7 U60.7 U61.7 U62.7 U63.7 U64.7 U65.7 U66.1 U66.14 U66.20 U66.22 U67.7 U68.7 U69.10 U70.1 U70.10 U71.7 U72.7 U73.7 U74.4 U74.5 U74.8 U75.7 U76.7 U77.7 U78.1 U78.2 U78.8 U79.1 U79.2 U79.8 U80.1 U80.2 U80.8 U81_OUT_0.7 U81_OUT_1.7 U82_OUT_0.10 U82_OUT_1.10 U83_OUT_0.1 U83_OUT_0.2 U83_OUT_0.8 U83_OUT_1.1 U83_OUT_1.2 U83_OUT_1.8 U84_OUT_0.1 U84_OUT_0.2 U84_OUT_0.8 U84_OUT_1.1 U84_OUT_1.2 U84_OUT_1.8 U85.10 U86.10 U87.3 U87.4 U87.5 U87.6 U87.8 U88.3 U88.4 U88.5 U88.6 U88.8 U89.3 U89.4 U89.5 U89.6 U89.8 U90.3 U90.4 U90.5 U90.6 U90.8 U91.3 U91.4 U91.5 U91.6 U91.8 U92.14 U92.20 U92.22 U93.14 U93.20 U93.22 U94.14 U94.20 U94.22
I\I\: U79.9 U79.10 U80.9 U80.10 U92.15
INST_0: U92.10 U93.10 U94.10
INST_1: U92.9 U93.9 U94.9
INST_2: U92.8 U93.8 U94.8
INST_3: U92.7 U93.7 U94.7
INST_4: U92.6 U93.6 U94.6
INST_5: U92.5 U93.5 U94.5
J\: U3.9 U4.9 U5.9 U6.9 U92.12
L\E\F\T\: U23.9 U25.9@232.918,42.164
L\O\A\D\: U7.9 U7.10 U8.9 U8.10 U9.9 U9.10 U10.9 U10.10 U93.16
L\O\A\D\_\L\S\B\: U51.19 U71.6
L\O\A\D\_\M\S\B\: U70.19 U71.3
L\O\A\D\_OUT_0: U12.4 U81_OUT_0.1 U81_OUT_0.2 U81_OUT_1.1 U81_OUT_1.2 U93.17
L\S\B\_\O\E\: U67.8 U69.1
LE: U68.11 U69.11
LEFT: U25.8@232.918,44.704 U26.4 U54.5 U54.13 U55.5 U55.13 U56.5 U56.13 U57.5 U57.13 U60.5 U60.13 U61.5 U61.13 U62.5 U62.13 U63.5 U63.13
LM: U11.3 U67.3 U68.5 U71.2 U71.10 U93.19
M0: U93.11
M1: U93.12
M2: U93.13
M3: U93.15
M\O\: U11.1 U67.1 U81_OUT_0.9 U81_OUT_0.10 U81_OUT_1.9 U81_OUT_1.10 U93.18
M\S\B\_\O\E\: U15.19 U67.10
M\U\L\T\: U24.15
MODE_0: U23.1 U24.1
MODE_1: U23.2 U24.2
MODE_2: U23.3 U24.3
MODE_3: U23.4 U24.6
N\O\P\: U23.15
NetC1_1: C1.1 R1.2 U71.13
NetC1_2: C1.2 U11.12
NetU3_15: U3.15 U4.10
NetU4_15: U4.15 U5.10
NetU5_15: U5.15 U6.10
NetU11_2: U11.2 U12.2
NetU11_4: U11.4 U12.10 U71.5
NetU11_9: U11.9 U12.3 U12.9 U71.9
NetU11_10: U11.10 U11.13
NetU12_6: U12.6 U71.1 U71.4 U71.12
NetU12_8: U12.8 U12.12
NetU25_2: U25.2@240.538,32.004 U26.1
NetU25_5: U25.5@240.538,39.624 U26.3
NetU25_13: U25.13@190.627,32.004 U77.8
NetU26_9: U26.9 U32.9
NetU26_10: U26.10 U65.8
NetU29_9: U29.9 U30.7
NetU30_9: U30.9 U31.7
NetU31_9: U31.9 U32.7
NetU54_6: U54.6 U58.1
NetU54_11: U54.11 U58.4
NetU55_3: U55.3 U58.2
NetU55_6: U55.6 U58.9
NetU55_8: U55.8 U58.5
NetU55_11: U55.11 U58.12
NetU56_3: U56.3 U58.10
NetU56_6: U56.6 U59.1
NetU56_8: U56.8 U58.13
NetU56_11: U56.11 U59.4
NetU57_3: U57.3 U59.2
NetU57_6: U57.6 U59.9
NetU57_8: U57.8 U59.5
NetU59_13: U59.13 U60.8
NetU60_6: U60.6 U64.1
NetU60_11: U60.11 U64.4
NetU61_3: U61.3 U64.2
NetU61_6: U61.6 U64.9
NetU61_8: U61.8 U64.5
NetU61_11: U61.11 U64.12
NetU62_3: U62.3 U64.10
NetU62_6: U62.6 U65.1
NetU62_8: U62.8 U64.13
NetU62_11: U62.11 U65.4
NetU63_3: U63.3 U65.2
NetU63_8: U63.8 U65.5
NetU67_2: U67.2 U68.2
NetU67_4: U67.4 U68.10
NetU67_9: U67.9 U68.3 U68.4 U68.9
NetU67_11: U67.11 U68.6
NetU68_8: U68.8 U68.12
NetU72_4: U72.4 U73.2
NetU72_5: U72.5 U74.15
NetU72_9: U72.9 U74.14
NetU72_10: U72.10
NetU72_11: U72.11 U74.13
NetU72_12: U72.12
NetU72_13: U72.13 U74.12
NetU73_6: U73.6 U74.6
NetU75_1: U75.1 U77.1
NetU75_4: U75.4 U77.2
NetU75_10: U75.10 U77.3
NetU75_13: U75.13 U77.4
NetU76_1: U76.1 U77.5
NetU76_4: U76.4 U77.6
NetU76_10: U76.10 U77.11
NetU76_13: U76.13 U77.12
NetU81_OUT_0_3: U81_OUT_0.3 U81_OUT_0.5
NetU81_OUT_0_6: U81_OUT_0.6 U83_OUT_0.9 U83_OUT_0.10 U84_OUT_0.9 U84_OUT_0.10
NetU81_OUT_0_8: U81_OUT_0.8 U81_OUT_0.13
NetU81_OUT_0_11: U81_OUT_0.11 U82_OUT_0.19
NetU81_OUT_1_3: U81_OUT_1.3 U81_OUT_1.5
NetU81_OUT_1_6: U81_OUT_1.6 U83_OUT_1.9 U83_OUT_1.10 U84_OUT_1.9 U84_OUT_1.10
NetU81_OUT_1_8: U81_OUT_1.8 U81_OUT_1.13
NetU81_OUT_1_11: U81_OUT_1.11 U82_OUT_1.19
NetU87_15: U87.15 U88.10
NetU88_15: U88.15 U89.10
NetU89_15: U89.15 U90.10
NetU91_2: U91.2
O\R\: U23.11 U39.19 U40.19
O\U\T\: U1.19 U2.19 U92.11
O\U\T\_REG_B: U17_REG_B.19 U18_REG_B.19
R\I\G\H\T: U23.7 U25.11@232.918,37.084
REG_0: U13.3 U14.2 U51.2 U66.11 U70.2
REG_0_OUT_0: U82_OUT_0.2 U83_OUT_0.3
REG_0_OUT_1: U82_OUT_1.2 U83_OUT_1.3
REG_1: U13.4 U14.3 U51.3 U66.12 U70.3
REG_1_OUT_0: U82_OUT_0.3 U83_OUT_0.4
REG_1_OUT_1: U82_OUT_1.3 U83_OUT_1.4
REG_2: U13.7 U14.4 U51.4 U66.13 U70.4
REG_2_OUT_0: U82_OUT_0.4 U83_OUT_0.5
REG_2_OUT_1: U82_OUT_1.4 U83_OUT_1.5
REG_3: U13.8 U14.5 U51.5 U66.15 U70.5
REG_3_OUT_0: U82_OUT_0.5 U83_OUT_0.6
REG_3_OUT_1: U82_OUT_1.5 U83_OUT_1.6
REG_4: U13.13 U14.6 U51.6 U66.16 U70.6
REG_4_OUT_0: U82_OUT_0.6 U84_OUT_0.3
REG_4_OUT_1: U82_OUT_1.6 U84_OUT_1.3
REG_5: U13.14 U14.7 U51.7 U66.17 U70.7
REG_5_OUT_0: U82_OUT_0.7 U84_OUT_0.4
REG_5_OUT_1: U82_OUT_1.7 U84_OUT_1.4
REG_6: U13.17 U14.8 U51.8 U66.18 U70.8
REG_6_OUT_0: U82_OUT_0.8 U84_OUT_0.5
REG_6_OUT_1: U82_OUT_1.8 U84_OUT_1.5
REG_7: U13.18 U14.9 U51.9 U66.19 U70.9
REG_7_OUT_0: U82_OUT_0.9 U84_OUT_0.6
REG_7_OUT_1: U82_OUT_1.9 U84_OUT_1.6
REG_8: U28.2 U31.4
REG_9: U28.3 U31.1
REG_10: U28.4 U31.13
REG_11: U28.5 U31.10
REG_12: U28.6 U32.4
REG_13: U28.7 U32.1
REG_14: U28.8 U32.13
REG_15: U28.9 U32.10
RIGHT: U25.10@232.918,39.624 U26.5 U54.1 U54.9 U55.1 U55.9 U56.1 U56.9 U57.1 U57.9 U60.1 U60.9 U61.1 U61.9 U62.1 U62.9 U63.1 U63.9
RU: U94.19
S\U\B\: U23.13 U25.3@240.538,34.544
SUB: U25.4@240.538,37.084 U26.2 U29.7
UC_0: U91.14 U92.4 U93.4 U94.4
UC_1: U91.13 U92.3 U93.3 U94.3
UC_2: U91.12 U92.25 U93.25 U94.25
UC_3: U91.11 U92.24 U93.24 U94.24
VCC: U1.1 U1.20 U2.1 U2.20 U3.16 U4.16 U5.16 U6.16 U7.16 U8.16 U9.16 U10.16 U11.14 U12.14 U13.20 U14.1 U14.20 U15.1 U15.20 U16.27 U16.28 U17_REG_A.1 U17_REG_A.20 U17_REG_B.1 U17_REG_B.20 U18_REG_A.1 U18_REG_A.20 U18_REG_B.1 U18_REG_B.20 U19_REG_A.16 U19_REG_B.16 U20_REG_A.16 U20_REG_B.16 U21_REG_A.16 U21_REG_B.16 U22_REG_A.16 U22_REG_B.16 U23.6 U23.16 U24.16 U25.14 U26.14 U27.1 U27.20 U28.1 U28.20 U29.16 U30.16 U31.16 U32.16 U33.1 U33.20 U34.1 U34.20 U35.14 U36.14 U37.14 U38.14 U39.1 U39.20 U40.1 U40.20 U41.14 U42.14 U43.14 U44.14 U45.1 U45.20 U46.1 U46.20 U47.14 U48.14 U49.14 U50.14 U51.20 U52.1 U52.20 U53.1 U53.20 U54.14 U55.14 U56.14 U57.14 U58.14 U59.14 U60.14 U61.14 U62.14 U63.14 U64.14 U65.14 U66.28 U67.14 U68.14 U69.20 U70.20 U71.14 U72.14 U73.14 U74.16 U75.14 U76.14 U77.14 U78.16 U79.16 U80.16 U81_OUT_0.14 U81_OUT_1.14 U82_OUT_0.1 U82_OUT_0.20 U82_OUT_1.1 U82_OUT_1.20 U83_OUT_0.16 U83_OUT_1.16 U84_OUT_0.16 U84_OUT_1.16 U85.1 U85.20 U86.1 U86.20 U87.7 U87.9 U87.10 U87.16 U88.7 U88.9 U88.16 U89.7 U89.9 U89.16 U90.7 U90.9 U90.16 U91.7 U91.9 U91.10 U91.16 U92.27 U92.28 U93.27 U93.28 U94.27 U94.28
W\E\: U66.27 U71.11
ZF: U92.1 U93.1 U94.1
ZF_IM: U25.12@190.627,34.544 U78.13
pads on no net: U1.2 U1.3 U1.4 U1.5 U1.6 U1.7 U1.8 U1.9 U2.2 U2.3 U2.4 U2.5 U2.6 U2.7 U2.8 U2.9 U3.11 U3.12 U3.13 U3.14 U4.11 U4.12 U4.13 U4.14 U5.11 U5.12 U5.13 U5.14 U6.11 U6.12 U6.13 U6.14 U6.15 U11.6 U11.8 U12.11 U12.13 U13.1 U13.11 U14.19 U15.2 U15.3 U15.4 U15.5 U15.6 U15.7 U15.8 U15.9 U16.11 U16.12 U16.13 U16.15 U16.16 U16.17 U16.18 U16.19 U23.10 U24.7 U24.9 U24.10 U24.11 U24.12 U24.13 U24.14 U25.1@198.247,29.464 U25.2@198.247,32.004 U25.3@198.247,34.544 U25.4@198.247,37.084 U25.5@198.247,39.624 U25.6 U25.8@190.627,44.704 U25.9@190.627,42.164 U25.10@190.627,39.624 U25.11@190.627,37.084 U25.12@232.918,34.544 U25.13@232.918,32.004 U26.6 U26.11 U26.12 U26.13 U27.2 U27.3 U27.4 U27.5 U27.6 U27.7 U27.8 U27.9 U27.19 U28.19 U29.1 U29.4 U29.10 U29.13 U30.1 U30.4 U30.10 U30.13 U33.2 U33.3 U33.4 U33.5 U33.6 U33.7 U33.8 U33.9 U34.2 U34.3 U34.4 U34.5 U34.6 U34.7 U34.8 U34.9 U35.3 U35.6 U35.8 U35.11 U36.3 U36.6 U36.8 U36.11 U37.3 U37.6 U37.8 U37.11 U38.3 U38.6 U38.8 U38.11 U39.2 U39.3 U39.4 U39.5 U39.6 U39.7 U39.8 U39.9 U40.2 U40.3 U40.4 U40.5 U40.6 U40.7 U40.8 U40.9 U41.3 U41.6 U41.8 U41.11 U42.3 U42.6 U42.8 U42.11 U43.3 U43.6 U43.8 U43.11 U44.3 U44.6 U44.8 U44.11 U45.2 U45.3 U45.4 U45.5 U45.6 U45.7 U45.8 U45.9 U45.19 U46.2 U46.3 U46.4 U46.5 U46.6 U46.7 U46.8 U46.9 U46.19 U47.1 U47.3 U47.4 U47.6 U47.8 U47.9 U47.11 U47.12 U48.1 U48.3 U48.4 U48.6 U48.8 U48.9 U48.11 U48.12 U49.1 U49.3 U49.4 U49.6 U49.8 U49.9 U49.11 U49.12 U50.1 U50.3 U50.4 U50.6 U50.8 U50.9 U50.11 U50.12 U51.10 U52.2 U52.3 U52.4 U52.5 U52.6 U52.7 U52.8 U52.9 U52.19 U53.2 U53.3 U53.4 U53.5 U53.6 U53.7 U53.8 U53.9 U53.19 U54.8 U58.3 U58.6 U58.8 U58.11 U59.3 U59.6 U59.8 U59.11 U63.6 U64.3 U64.6 U64.8 U64.11 U65.3 U65.6 U65.11 U65.12 U65.13 U67.12 U67.13 U68.1 U69.3 U69.4 U69.7 U69.8 U69.13 U69.14 U69.17 U69.18 U71.8 U72.2 U73.8 U73.9 U73.10 U73.11 U73.12 U73.13 U74.7 U74.9 U74.10 U74.11 U77.9 U77.10 U77.13 U78.3 U78.4 U78.5 U78.6 U78.11 U78.12 U79.3 U79.4 U79.5 U79.6 U79.11 U79.12 U79.13 U79.14 U80.3 U80.4 U80.5 U80.6 U80.11 U80.12 U80.13 U80.14 U85.2 U85.3 U85.4 U85.5 U85.6 U85.7 U85.8 U85.9 U85.19 U86.2 U86.3 U86.4 U86.5 U86.6 U86.7 U86.8 U86.9 U86.19 U87.2 U87.11 U87.12 U87.13 U87.14 U88.2 U88.11 U88.12 U88.13 U88.14 U89.2 U89.11 U89.12 U89.13 U89.14 U90.2 U90.11 U90.12 U90.13 U90.14 U90.15 U91.1 U91.15 U92.2 U92.21 U92.23 U93.2 U93.21 U93.23 U94.2 U94.11 U94.12 U94.13 U94.15 U94.16 U94.17 U94.18 U94.21 U94.23